# Allegro board AFK20.brd
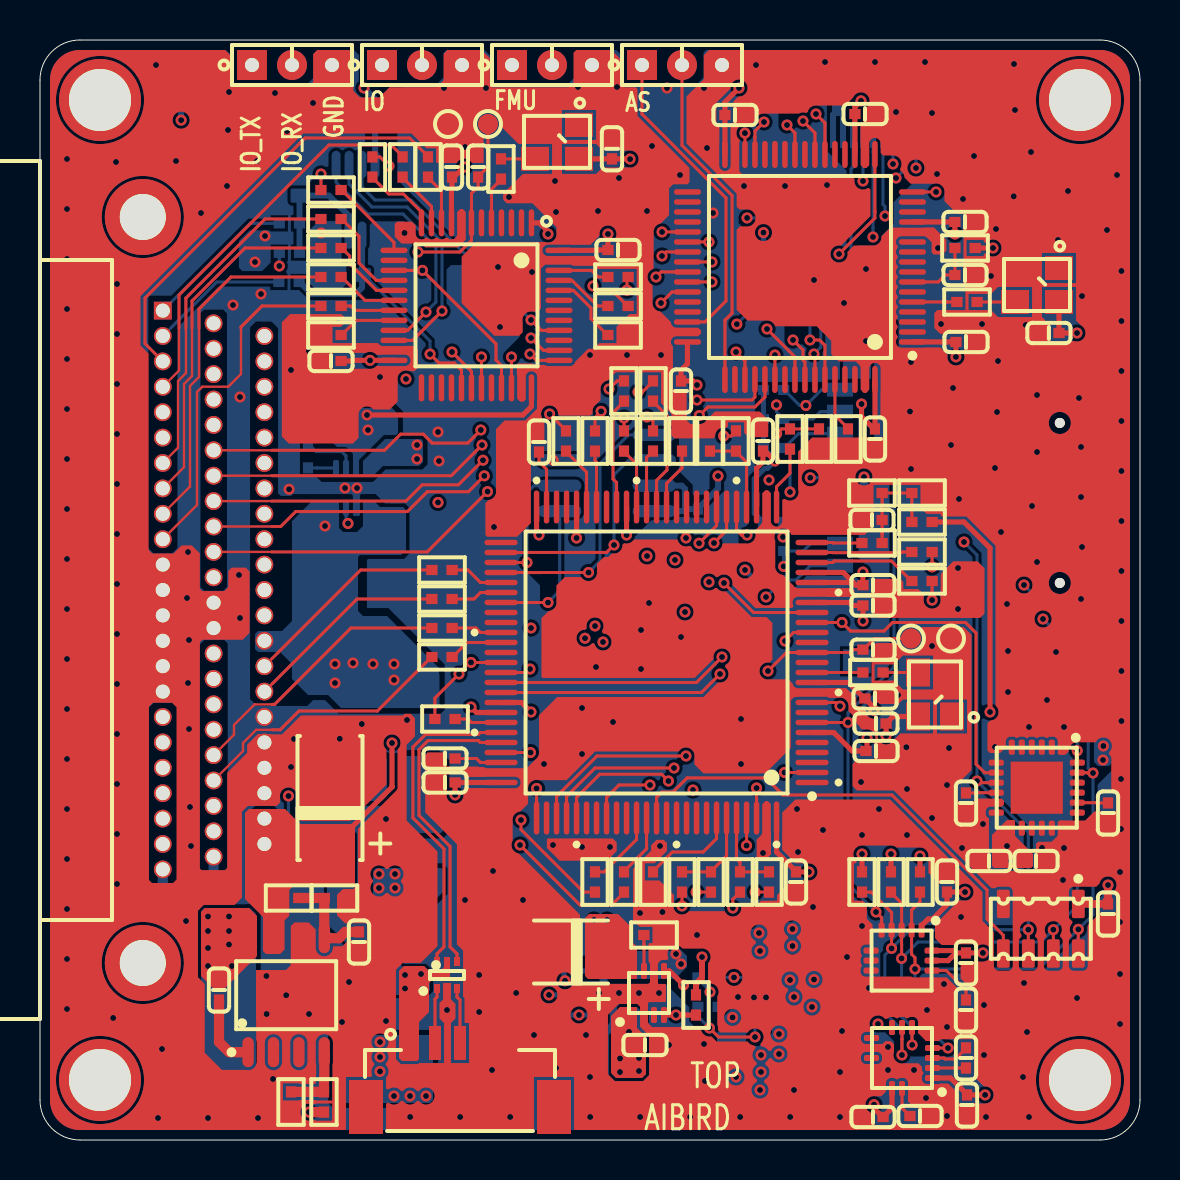
[diagram p0: board, top side]
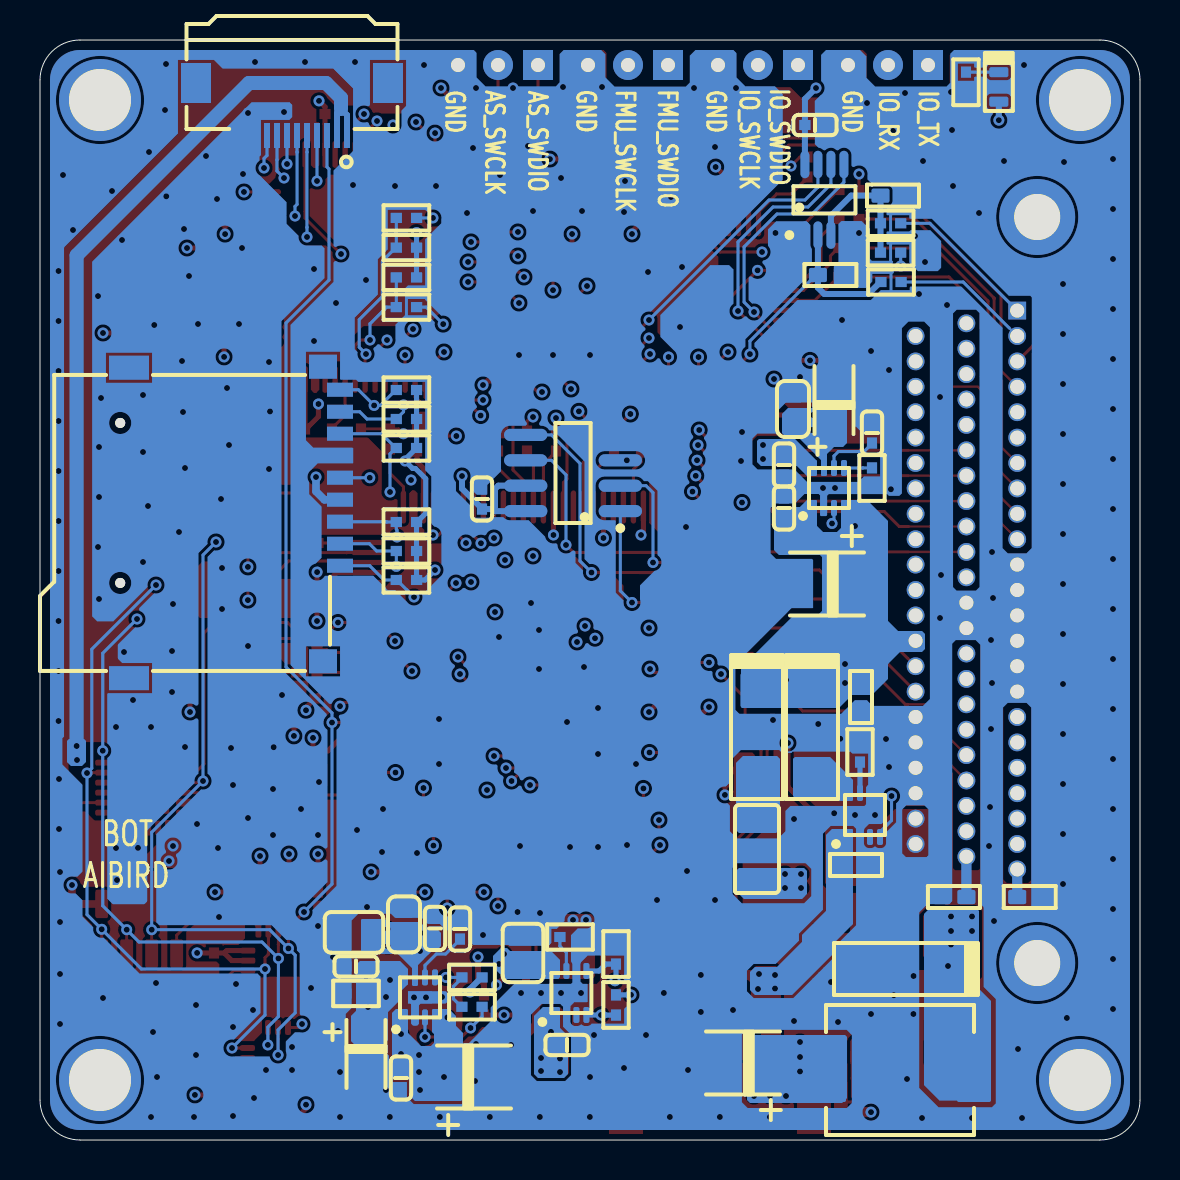
[diagram p1: board, bottom side, seen from below]

Outline 55 x 55 mm; copper layers: TOP, GND_L2, IN1_L3, IN2_L4, VCC_L5, BOTTOM. Coordinates in mm from the lower left corner of the outline.
Outline path: 0,53 0,2 arc(0.59,0.59) 2,0 53,0 arc(54.41,0.59) 55,2 55,53 arc(54.41,54.41) 53,55 2,55 arc(0.59,54.41) 0,53

## Design rules (mm)
net group DP1: nets FMU_OTG_FS_DM FMU_OTG_FS_DP

## Placement (name value [footprint] x y rotation side)
C1  0.1uF  [C0402]  41.25 51.3 0 top
C2  0.1uF  [C0402]  34.75 51.25 0 top
C3  0.1uF  [C0402]  28.6 49.56 90 top
C4  0.1uF  [C0402]  20.6 48.65 90 top
C5  0.1uF  [C0402]  21.91 48.65 90 top
C6  0.1uF  [C0402]  46.25 45.9 0 top
C7  0.1uF  [C0402]  28.9 44.5 0 top
C8  0.1uF  [C0402]  46.25 43.25 0 top
C9  0.1uF  [C0402]  50.45 40.35 180 top
C10  0.1uF  [C0402]  46.3 39.9 0 top
C11  0.1uF  [C0402]  14.55 38.95 180 top
C12  0.1uF  [C0402]  32.05 37.45 270 top
C13  0.1uF  [C0402]  41.75 35.05 270 top
C14  0.1uF  [C0402]  36.15 34.95 90 top
C15  2.2uF  [C0402]  24.95 34.9 90 top
C16  0.1u/50V  [C0402]  41.6 31 180 top
C17  0.1uF  [C0402]  41.65 27.74 0 top
C18  0.1uF  [C0402]  41.65 26.72 0 top
C19  0.1uF  [C0402]  41.65 24.52 0 top
C20  0.1uF  [C0402]  41.75 22.08 0 top
C21  0.1uF  [C0402]  41.8 20.83 180 top
C22  0.1uF  [C0402]  41.8 19.45 0 top
C23  2.2uF  [C0402]  20.25 19.08 180 top
C24  0.1uF  [C0402]  20.25 17.88 180 top
C25  10uF/35V  [C6032-C]  14.5 17.1 90 top
C26  2.2u/16V  [C0402]  46.3 16.85 270 top
C27  0.01u/50V  [C0402]  53.4 16.35 270 top
C28  2.2u/16V  [C0402]  47.45 13.95 180 top
C29  0.1uF/50V  [C0402]  49.8 13.95 0 top
C30  0.1uF  [C0402]  37.8 12.9 270 top
C31  10uF/16V  [C0402]  45.35 12.9 90 top
C32  0.1uF/50V  [C0402]  53.4 11.3 270 top
C33  NC  [C0402]  15.95 9.9 270 top
C34  47uF/10V  [C3528-B]  26.55 9.4 180 top
C35  0.1uF/50V  [C0402]  46.3 8.85 270 top
C36  0.01uF/50V  [C0402]  8.95 7.5 90 top
C37  10nF/50V  [C0402]  46.3 6.5 90 top
C38  1uF/16V  [C0402]  30.25 4.75 0 top
C39  0.1uF/50V  [C0402]  46.3 4.1 90 top
C40  0.1uF/50V  [C0402]  46.35 1.75 270 top
C41  10uF/16V  [C0402]  44 1.2 0 top
C42  10uF/16V  [C0402]  41.65 1.15 180 top
C43  0.1uF  [C0402]  16.25 50.75 180 bottom
C44  22uF/10V  [C3216-A]  15.3 37 90 bottom
C45  1uF  [C0603]  17.35 36.55 90 bottom
C46  10nF  [C0402]  13.4 35.35 90 bottom
C47  2.2uF  [C0402]  17.8 33.75 270 bottom
C48  0.1uF  [C0402]  32.9 32.05 90 bottom
C49  0.1uF  [C0402]  17.8 31.6 90 bottom
C50  47uF/10V  [C3528-B]  15.65 27.8 0 bottom
C51  1uF  [C0603]  36.8 10.78 90 bottom
C52  0.1uF  [C0402]  35.25 10.58 90 bottom
C53  10nF  [C0402]  34 10.55 90 bottom
C54  22uF/25V  [C0805]  39.3 10.38 0 bottom
C55  22uF/25V  [C0805]  30.85 9.35 90 bottom
C56  0.1uF  [C0402]  39.2 8.68 0 bottom
C57  1uF/16V  [C0402]  28.65 4.75 180 bottom
C58  22uF/10V  [C3216-A]  38.7 4.3 270 bottom
C59  47uF/10V  [C3528-B]  19.85 3.85 0 bottom
C60  47uF/25V  [C3528-B]  33.3 3.15 180 bottom
C61  0.1uF  [C0402]  36.95 3.1 270 bottom
D1  STM32F103C8T6  [LQFP48]  21.82 41.73 270 top
D2  STM32F427  [STM32F427VGT6_LQFP100]  30.83 23.88 180 top
D3  NUF2042XV6  [NUF2042XV6_SOT563-6]  20.35 8.25 0 top
D4  -  [PESD0402-140]  12.35 47.22 180 bottom
D5  -  [PESD0402-140]  15.48 43.25 180 bottom
D6  FM25V01  [FM25V01_SOIC8]  28.35 33.35 90 bottom
D7  -  [TF-01A]  40 37.51 270 bottom
D8  -  [PESD0402-140]  13.95 22.15 270 bottom
D9  SS24  [SMA]  19.15 20.35 270 bottom
D10  SS24  [SMA]  16.4 20.35 270 bottom
D11  -  [PESD0402-140]  14.2 13.75 180 bottom
D12  -  [PESD0402-140]  9.3 12.15 0 bottom
D13  -  [PESD0402-140]  5.51 12.15 180 bottom
D14  B340A  [SMA]  12 8.55 0 bottom
J1  CON3  [HDR200M_1X3]  10.6 53.75 0 top
J2  CON3  [HDR200M_1X3]  17.1 53.75 0 top
J3  CON3  [HDR200M_1X3]  23.6 53.75 0 top
J4  CON3  [HDR200M_1X3]  30.1 53.75 0 top
J5  4 HEADER  [SM05B-GHS-TB]  21 4.85 0 top
J6  HEADER 12  [0_5-12-12PBX]  42.4 50.23 0 bottom
L1  0630-4.7uH/5.5A  [L0630]  12 3.5 180 bottom
LED1  Red  [LED0603]  7.06 52.65 270 bottom
N1  74LVC2G240  [74LVC2G240_TSSOP8]  15.78 47.01 180 bottom
N2  MIC5332  [MIC5332_MLF8]  15.55 32.6 90 bottom
N3  BQ24313  [BQ24313_QFN8-DSG]  13.75 16.25 90 bottom
N4  MIC5332  [MIC5332_MLF8]  36 7.13 90 bottom
R1  220  [R0402]  16.62 48.65 270 top
R2  220  [R0402]  18.13 48.65 90 top
R3  220  [R0402]  19.4 48.65 90 top
R4  22R  [R0402]  23.05 48.55 270 top
R5  220  [R0402]  14.55 47.5 0 top
R6  220  [R0402]  14.55 46.05 180 top
R7  220  [R0402]  14.55 44.6 180 top
R8  10K  [R0402]  46.25 44.6 180 top
R9  220  [R0402]  14.55 43.15 180 top
R10  220  [R0402]  28.9 43.15 0 top
R11  22R  [R0402]  46.35 41.9 180 top
R12  220  [R0402]  14.55 41.7 180 top
R13  220  [R0402]  28.9 41.7 0 top
R14  10K  [R0402]  14.55 40.25 180 top
R15  10K  [R0402]  28.9 40.25 180 top
R16  220  [R0402]  29.2 37.45 90 top
R17  120  [R0402]  30.65 37.45 90 top
R18  10K/0.1%  [R0402]  37.5 35.05 90 top
R19  1M  [R0402]  38.95 35.05 90 top
R20  4.7K  [R0402]  40.4 35.05 90 top
R21  220  [R0402]  26.3 34.95 90 top
R22  220  [R0402]  27.75 34.95 90 top
R23  220  [R0402]  29.2 34.95 90 top
R24  120  [R0402]  30.65 34.95 90 top
R25  10K  [R0402]  32.1 34.95 270 top
R26  10K/0.1%  [R0402]  33.5 34.95 90 top
R27  10K/0.1%  [R0402]  34.8 34.95 90 top
R28  1.5K/0.1%  [R0402]  41.6 32.35 0 top
R29  1M  [R0402]  44.1 32.35 180 top
R30  13.7K/0.1%  [R0402]  44.1 30.9 0 top
R31  10K/0.1%  [R0402]  41.6 29.85 0 top
R32  120  [R0402]  44.1 29.4 0 top
R33  120  [R0402]  20.1 28.5 180 top
R34  120  [R0402]  44.1 27.95 0 top
R35  120  [R0402]  20.1 27.05 180 top
R36  220  [R0402]  20.1 25.6 180 top
R37  220  [R0402]  20.1 24.15 180 top
R38  22R  [R0402]  41.65 23.38 180 top
R39  470R  [R0402]  20.25 21.05 0 top
R40  120  [R0402]  27.75 12.9 270 top
R41  120  [R0402]  29.2 12.9 270 top
R42  10K  [R0402]  30.65 12.9 270 top
R43  1K5  [R0402]  32.1 12.9 270 top
R44  120  [R0402]  33.55 12.9 270 top
R45  1K5  [R0402]  35 12.9 270 top
R46  120  [R0402]  36.45 12.9 270 top
R47  NC  [R0402]  41.1 12.9 270 top
R48  NC  [R0402]  42.55 12.9 270 top
R49  NC  [R0402]  44 12.9 270 top
R50  NC  [R0402]  12.43 12.1 180 top
R51  NC  [R0402]  14.72 12.1 180 top
R52  16.5K  [R0402]  30.7 10.25 180 top
R53  1M  [R0402]  32.8 6.75 90 top
R54  10K  [R0402]  12.55 1.9 90 top
R55  10K  [R0402]  14.2 1.9 270 top
R56  10K  [R0402]  8.7 52.89 90 bottom
R57  220  [R0402]  12.47 45.84 180 bottom
R58  10K  [R0402]  12.47 44.37 0 bottom
R59  220  [R0402]  12.45 42.9 180 bottom
R60  100K  [R0402]  36.68 37.5 180 bottom
R61  100K  [R0402]  36.68 36.05 180 bottom
R62  100K  [R0402]  36.68 34.6 180 bottom
R63  10K  [R0402]  13.4 33.1 90 bottom
R64  100K  [R0402]  36.68 30.9 180 bottom
R65  100K  [R0402]  36.68 29.45 180 bottom
R66  100K  [R0402]  36.68 28 180 bottom
R67  100K  [R0402]  14 19.4 270 bottom
R68  25.5K  [R0402]  28.5 10.15 0 bottom
R69  10K  [R0402]  26.2 9.3 270 bottom
R70  10K  [R0402]  33.4 8.13 0 bottom
R71  220R  [R0402]  39.2 7.33 0 bottom
R72  1M  [R0402]  26.2 6.75 90 bottom
R73  10K  [R0402]  33.4 6.66 0 bottom
R74  120  [R0402]  36.68 46.1 180 bottom
R75  1K5  [R0402]  36.68 44.62 180 bottom
R76  1K5  [R0402]  36.68 43.13 180 bottom
R77  120  [R0402]  36.68 41.64 180 bottom
RT1  PTS120616V035  [F1206]  19.15 14.55 90 bottom
TP1  MH  [MTG310_410]  3 52 0 top
TP2  MH  [MTG310_410]  52 52 0 top
TP3  T  [TEST1_0]  20.4 50.8 270 top
TP4  T  [TEST1_0]  22.4 50.8 270 top
TP5  T  [TEST1_0]  43.55 25.08 180 top
TP6  T  [TEST1_0]  45.55 25.08 180 top
TP7  MH  [MTG310_410]  3 3 0 top
TP8  MH  [MTG310_410]  52 3 0 top
U1  stm32f103rct6  [LQFP64]  38 43.65 180 top
U2  J30J-66  [J30J-66ZKW-J]  6.14 41.47 270 top
U3  MPU6000  [QFN24_MPU60X0]  49.84 17.62 270 top
U4  MS5611-01BA03  [SOP125P8]  50.04 10.56 270 top
U5  L3GD20H  [L3GD20H_LGA16]  43.08 8.97 270 top
U6  BQ24315  [BQ24315_QFN8-DSG]  30.45 7.35 90 top
U7  TPS5430DDA  [TPS5430_DDA]  12.31 7.24 0 top
U8  LSM303D  [LSM303D_LGA16]  43.1 4.1 180 top
U9  BQ24315  [BQ24315_QFN8-DSG]  28.43 7.35 90 bottom
X1  24M  [OSC3225]  25.85 49.91 180 top
X2  24M  [OSC3225]  49.85 42.75 180 top
X3  24M  [OSC3225]  44.75 22.28 90 top

## Library data of the parts
C1-C15 C17-C24 C30 C38 C43 C45-C49 C51-C57 C61 = C_2: User Part Number: pn; Tolerance: RichardLC
C16 C26-C29 C31-C33 C35-C37 C39-C42 = CAP NP: User Part Number: pn; Tolerance: RichardLC
C25 C34 C44 C50 C58-C60 = CAP POL: User Part Number: pn; Tolerance: RichardLC
D1 = STM32F103C8T6_1: User Part Number: pn; Tolerance: RichardLC
D2 = STM32F427_10: User Part Number: pn; Tolerance: RichardLC
D3 = NUF2042XV6: User Part Number: pn; Tolerance: RichardLC
D4 D5 D13 = DIODE ZENER1
D6 = FM25V01: User Part Number: pn; Tolerance: RichardLC
D7 = 2908-05WB-MG_0
D8 D11 D12 = DIODE ZENER1_1
D9 D10 = DIODE: User Part Number: pn; Tolerance: RichardLC
D14 = DIODE_SCHOTTKY_0: User Part Number: pn; Tolerance: RichardLC
J1-J4 = CON3: User Part Number: pn; Tolerance: RichardLC
J5 = 4 HEADER_1
J6 = HEADER 12
L1 = Inductor: User Part Number: pn; Tolerance: RichardLC
LED1 = LED: User Part Number: pn; Tolerance: RichardLC
N1 = 74LVC2G240: User Part Number: pn; Tolerance: RichardLC
N2 N4 = MIC5332: User Part Number: pn; Tolerance: RichardLC
N3 = BQ24313_1: User Part Number: pn; Tolerance: RichardLC
R1-R3 R5-R7 R9 R10 R12-R19 R21-R24 R26 R27 R29 R31-R37 R40 R41 R43-R46 R52 R53 R56-R77 = R: User Part Number: pn; Tolerance: RichardLC
R4 R8 R11 R20 R25 R28 R30 R38 R39 R42 R47-R51 R54 R55 = R2: User Part Number: pn; Tolerance: RichardLC
RT1 = VARISTOR SYM
TP1 TP2 TP7 TP8 = TP: User Part Number: pn; Tolerance: RichardLC
TP3-TP6 = TEST POINT
U1 = stm32f103rct6_2: User Part Number: pn; Tolerance: RichardLC
U2 = J30J-66
U3 = MPU6000: User Part Number: pn; Tolerance: RichardLC
U4 = MS5607B: User Part Number: pn; Tolerance: RichardLC
U5 = L3GD20H_0: User Part Number: pn; Tolerance: RichardLC
U6 U9 = BQ24315_2: User Part Number: pn; Tolerance: RichardLC
U7 = TPS5430: User Part Number: pn; Tolerance: RichardLC
U8 = LSM303D: User Part Number: pn; Tolerance: RichardLC
X1-X3 = SMD Crystal Oscillators_0

## Footprints (pads in the part's own frame, mm; a bottom-side part is the same pattern mirrored in y, then rotated)
0_5-12-12PBX
  rect 1.5x2 smd: (-4.8,-2.625) (4.8,-2.625)
  rect 0.3x1.25 smd: 1(-2.75,0) 2(-2.25,0) 3(-1.75,0) 4(-1.25,0) 5(-0.75,0) 6(-0.25,0) 7(0.25,0) 8(0.75,0) 9(1.25,0) 10(1.75,0) 11(2.25,0) 12(2.75,0)
74LVC2G240_TSSOP8
  oval 0.45x1.37 smd: 1(-0.975,-1.765) 2(-0.325,-1.765) 3(0.325,-1.765) 4(0.975,-1.765) 5(0.975,1.765) 6(0.325,1.765) 7(-0.325,1.765) 8(-0.975,1.765)
BQ24313_QFN8-DSG
  custom 0.8x0.3 smd: 1(-1.1,0.75) 2(-1.1,0.25) 3(-1.1,-0.25) 4(-1.1,-0.75) 5(1.1,-0.75) 6(1.1,-0.25) 7(1.1,0.25) 8(1.1,0.75)
  rect 0.9x1.6 smd: 9(0,0)
BQ24315_QFN8-DSG
  custom 0.8x0.3 smd: 1(-1.1,0.75) 2(-1.1,0.25) 3(-1.1,-0.25) 4(-1.1,-0.75) 5(1.1,-0.75) 6(1.1,-0.25) 7(1.1,0.25) 8(1.1,0.75)
  rect 0.9x1.6 smd: 9(0,0)
C0402
  rect 0.559x0.508 smd: 1(-0.504,0) 2(0.504,0)
C0603
  rect 0.762x0.813 smd: 1(-0.706,0) 2(0.706,0)
C0805
  rect 0.9x1.27 smd: 1(-0.825,0) 2(0.825,0)
C3216-A
  rect 1.4x1.2 smd: 1(-1.25,0) 2(1.25,0)
C3528-B
  rect 1.6x2.4 smd: 1(-1.5,0) 2(1.5,0)
C6032-C
  custom 2.25x2.4 smd: 1(-2.475,0) 2(2.475,0)
F1206
  rect 1x1.9 smd: 1(-1.5,0) 2(1.5,0)
FM25V01_SOIC8
  oval 0.61x2.17 smd: 1(-1.905,-2.365) 2(-0.635,-2.365) 3(0.635,-2.365) 4(1.905,-2.365) 5(1.905,2.365) 6(0.635,2.365) 7(-0.635,2.365) 8(-1.905,2.365)
HDR200M_1X3
  rect 1.5x1.5 hole 0.7: 1(0,0)
  round 1.5 hole 0.7: 2(2,0) 3(4,0)
J30J-66ZKW-J
  round 3.8 hole 2.3: (-4.68,-1) (32.62,-1)
  rect 0.89x0.89 hole 0.7: 1(0,0)
  round 0.89 hole 0.7: 2(1.27,0) 3(2.54,0) 4(3.81,0) 5(5.08,0) 6(6.35,0) 7(7.62,0) 8(8.89,0) 9(10.16,0) 10(11.43,0) 11(12.7,0) 12(13.97,0) 13(15.24,0) 14(16.51,0) 15(17.78,0) 16(19.05,0) 17(20.32,0) 18(21.59,0) 19(22.86,0) 20(24.13,0) 21(25.4,0) 22(26.67,0) 23(27.94,0) 24(0.635,2.54) 25(1.905,2.54) 26(3.175,2.54) 27(4.445,2.54) 28(5.715,2.54) 29(6.985,2.54) 30(8.255,2.54) 31(9.525,2.54) 32(10.795,2.54) 33(12.065,2.54) 34(13.335,2.54) 35(14.605,2.54) 36(15.875,2.54) 37(17.145,2.54) 38(18.415,2.54) 39(19.685,2.54) 40(20.955,2.54) 41(22.225,2.54) 42(23.495,2.54) 43(24.765,2.54) 44(26.035,2.54) 45(27.305,2.54) 46(1.27,5.08) 47(2.54,5.08) 48(3.81,5.08) 49(5.08,5.08) 50(6.35,5.08) 51(7.62,5.08) 52(8.89,5.08) 53(10.16,5.08) 54(11.43,5.08) 55(12.7,5.08) 56(13.97,5.08) 57(15.24,5.08) 58(16.51,5.08) 59(17.78,5.08) 60(19.05,5.08) 61(20.32,5.08) 62(21.59,5.08) 63(22.86,5.08) 64(24.13,5.08) 65(25.4,5.08) 66(26.67,5.08)
L3GD20H_LGA16
  custom 0.75x0.3 smd: 1(-1.525,1) 2(-1.525,0.5) 3(-1.525,0) 4(-1.525,-0.5) 5(-1.525,-1) 9(1.525,-1) 10(1.525,-0.5) 11(1.525,0) 12(1.525,0.5) 13(1.525,1)
  custom 0.3x0.75 smd: 6(-0.5,-1.525) 7(0,-1.525) 8(0.5,-1.525) 14(0.5,1.525) 15(0,1.525) 16(-0.5,1.525)
L0630
  custom 1.7x3.2 smd: 1(-3.55,0) 2(3.7,0)
LED0603
  custom 0.5x0.95 smd: 1(-0.738,0) 2(0.738,0)
LQFP48
  oval 1.35x0.27 smd: 1(-4.125,2.75) 2(-4.125,2.25) 3(-4.125,1.75) 4(-4.125,1.25) 5(-4.125,0.75) 6(-4.125,0.25) 7(-4.125,-0.25) 8(-4.125,-0.75) 9(-4.125,-1.25) 10(-4.125,-1.75) 11(-4.125,-2.25) 12(-4.125,-2.75) 25(4.125,-2.75) 26(4.125,-2.25) 27(4.125,-1.75) 28(4.125,-1.25) 29(4.125,-0.75) 30(4.125,-0.25) 31(4.125,0.25) 32(4.125,0.75) 33(4.125,1.25) 34(4.125,1.75) 35(4.125,2.25) 36(4.125,2.75)
  oval 0.27x1.35 smd: 13(-2.75,-4.125) 14(-2.25,-4.125) 15(-1.75,-4.125) 16(-1.25,-4.125) 17(-0.75,-4.125) 18(-0.25,-4.125) 19(0.25,-4.125) 20(0.75,-4.125) 21(1.25,-4.125) 22(1.75,-4.125) 23(2.25,-4.125) 24(2.75,-4.125) 37(2.75,4.125) 38(2.25,4.125) 39(1.75,4.125) 40(1.25,4.125) 41(0.75,4.125) 42(0.25,4.125) 43(-0.25,4.125) 44(-0.75,4.125) 45(-1.25,4.125) 46(-1.75,4.125) 47(-2.25,4.125) 48(-2.75,4.125)
LQFP64
  oval 1.35x0.27 smd: 1(-5.625,3.75) 2(-5.625,3.25) 3(-5.625,2.75) 4(-5.625,2.25) 5(-5.625,1.75) 6(-5.625,1.25) 7(-5.625,0.75) 8(-5.625,0.25) 9(-5.625,-0.25) 10(-5.625,-0.75) 11(-5.625,-1.25) 12(-5.625,-1.75) 13(-5.625,-2.25) 14(-5.625,-2.75) 15(-5.625,-3.25) 16(-5.625,-3.75) 33(5.625,-3.75) 34(5.625,-3.25) 35(5.625,-2.75) 36(5.625,-2.25) 37(5.625,-1.75) 38(5.625,-1.25) 39(5.625,-0.75) 40(5.625,-0.25) 41(5.625,0.25) 42(5.625,0.75) 43(5.625,1.25) 44(5.625,1.75) 45(5.625,2.25) 46(5.625,2.75) 47(5.625,3.25) 48(5.625,3.75)
  oval 0.27x1.35 smd: 17(-3.75,-5.625) 18(-3.25,-5.625) 19(-2.75,-5.625) 20(-2.25,-5.625) 21(-1.75,-5.625) 22(-1.25,-5.625) 23(-0.75,-5.625) 24(-0.25,-5.625) 25(0.25,-5.625) 26(0.75,-5.625) 27(1.25,-5.625) 28(1.75,-5.625) 29(2.25,-5.625) 30(2.75,-5.625) 31(3.25,-5.625) 32(3.75,-5.625) 49(3.75,5.625) 50(3.25,5.625) 51(2.75,5.625) 52(2.25,5.625) 53(1.75,5.625) 54(1.25,5.625) 55(0.75,5.625) 56(0.25,5.625) 57(-0.25,5.625) 58(-0.75,5.625) 59(-1.25,5.625) 60(-1.75,5.625) 61(-2.25,5.625) 62(-2.75,5.625) 63(-3.25,5.625) 64(-3.75,5.625)
LSM303D_LGA16
  custom 0.75x0.3 smd: 1(-1.525,1) 2(-1.525,0.5) 3(-1.525,0) 4(-1.525,-0.5) 5(-1.525,-1) 9(1.525,-1) 10(1.525,-0.5) 11(1.525,0) 12(1.525,0.5) 13(1.525,1)
  custom 0.3x0.75 smd: 6(-0.5,-1.525) 7(0,-1.525) 8(0.5,-1.525) 14(0.5,1.525) 15(0,1.525) 16(-0.5,1.525)
MIC5332_MLF8
  custom 0.8x0.3 smd: 1(-1,0.75) 2(-1,0.25) 3(-1,-0.25) 4(-1,-0.75) 5(1,-0.75) 6(1,-0.25) 7(1,0.25) 8(1,0.75)
  rect 0.6x1.2 smd: 9(0,0)
MTG310_410
  round 4.1 hole 3.1: 1(0,0)
NUF2042XV6_SOT563-6
  rect 0.3x0.45 smd: 1(-0.5,-0.675) 2(0,-0.675) 3(0.5,-0.675) 4(0.5,0.675) 5(0,0.675) 6(-0.5,0.675)
OSC3225
  rect 1.4x1.2 smd: 1(-1.1,-0.85) 2(1.1,-0.85) 3(1.1,0.85) 4(-1.1,0.85)
PESD0402-140
  custom 0.9x0.71 smd: 1(-0.625,0) 2(0.625,0)
QFN24_MPU60X0
  custom 0.75x0.3 smd: 1(-2.025,1.25) 2(-2.025,0.75) 3(-2.025,0.25) 4(-2.025,-0.25) 5(-2.025,-0.75) 6(-2.025,-1.25) 13(2.025,-1.25) 14(2.025,-0.75) 15(2.025,-0.25) 16(2.025,0.25) 17(2.025,0.75) 18(2.025,1.25)
  custom 0.3x0.75 smd: 7(-1.25,-2.025) 8(-0.75,-2.025) 9(-0.25,-2.025) 10(0.25,-2.025) 11(0.75,-2.025) 12(1.25,-2.025) 19(1.25,2.025) 20(0.75,2.025) 21(0.25,2.025) 22(-0.25,2.025) 23(-0.75,2.025) 24(-1.25,2.025)
  rect 2.6x2.6 smd: 25(0,0)
R0402
  rect 0.559x0.508 smd: 1(-0.505,0) 2(0.505,0)
SM05B-GHS-TB
  rect 1.7x2.7 smd: (-4.7,-3.2) (4.7,-3.2)
  rect 0.6x1.7 smd: 1(-2.5,0) 2(-1.25,0) 3(0,0) 4(1.25,0) 5(2.5,0)
SMA
  custom 1.72x1.65 smd: 1(-2.135,0) 2(2.135,0)
SOP125P8
  custom 1.42x0.64 smd: 1(-1.24,1.875) 2(-1.24,0.625) 3(-1.24,-0.625) 4(-1.24,-1.875) 5(1.24,-1.875) 6(1.24,-0.625) 7(1.24,0.625) 8(1.24,1.875)
STM32F427VGT6_LQFP100
  oval 1.65x0.27 smd: 1(-7.775,6) 2(-7.775,5.5) 3(-7.775,5) 4(-7.775,4.5) 5(-7.775,4) 6(-7.775,3.5) 7(-7.775,3) 8(-7.775,2.5) 9(-7.775,2) 10(-7.775,1.5) 11(-7.775,1) 12(-7.775,0.5) 13(-7.775,0) 14(-7.775,-0.5) 15(-7.775,-1) 16(-7.775,-1.5) 17(-7.775,-2) 18(-7.775,-2.5) 19(-7.775,-3) 20(-7.775,-3.5) 21(-7.775,-4) 22(-7.775,-4.5) 23(-7.775,-5) 24(-7.775,-5.5) 25(-7.775,-6) 51(7.775,-6) 52(7.775,-5.5) 53(7.775,-5) 54(7.775,-4.5) 55(7.775,-4) 56(7.775,-3.5) 57(7.775,-3) 58(7.775,-2.5) 59(7.775,-2) 60(7.775,-1.5) 61(7.775,-1) 62(7.775,-0.5) 63(7.775,0) 64(7.775,0.5) 65(7.775,1) 66(7.775,1.5) 67(7.775,2) 68(7.775,2.5) 69(7.775,3) 70(7.775,3.5) 71(7.775,4) 72(7.775,4.5) 73(7.775,5) 74(7.775,5.5) 75(7.775,6)
  oval 0.27x1.65 smd: 26(-6,-7.775) 27(-5.5,-7.775) 28(-5,-7.775) 29(-4.5,-7.775) 30(-4,-7.775) 31(-3.5,-7.775) 32(-3,-7.775) 33(-2.5,-7.775) 34(-2,-7.775) 35(-1.5,-7.775) 36(-1,-7.775) 37(-0.5,-7.775) 38(0,-7.775) 39(0.5,-7.775) 40(1,-7.775) 41(1.5,-7.775) 42(2,-7.775) 43(2.5,-7.775) 44(3,-7.775) 45(3.5,-7.775) 46(4,-7.775) 47(4.5,-7.775) 48(5,-7.775) 49(5.5,-7.775) 50(6,-7.775) 76(6,7.775) 77(5.5,7.775) 78(5,7.775) 79(4.5,7.775) 80(4,7.775) 81(3.5,7.775) 82(3,7.775) 83(2.5,7.775) 84(2,7.775) 85(1.5,7.775) 86(1,7.775) 87(0.5,7.775) 88(0,7.775) 89(-0.5,7.775) 90(-1,7.775) 91(-1.5,7.775) 92(-2,7.775) 93(-2.5,7.775) 94(-3,7.775) 95(-3.5,7.775) 96(-4,7.775) 97(-4.5,7.775) 98(-5,7.775) 99(-5.5,7.775) 100(-6,7.775)
TEST1_0
  round 1 smd: 1(0,0)
TF-01A
  rect 1.2x1.4 smd: (-1.15,-0.85) (13.58,-0.85)
  rect 1.2x2 smd: (-1.1,-10.55) (14.42,-10.55)
  round 0.5 hole 0.8 unplated: (1.66,-10.99) (9.66,-10.99)
  rect 0.7x1.3 smd: 1(8.8,0) 2(7.7,0) 3(6.6,0) 4(5.5,0) 5(4.4,0) 6(3.3,0) 7(2.2,0) 8(1.1,0) 9(0,0)
TPS5430_DDA
  oval 0.56x1.5 smd: 1(-1.905,-2.85) 2(-0.635,-2.85) 3(0.635,-2.85) 4(1.905,-2.85) 5(1.905,2.85) 6(0.635,2.85) 7(-0.635,2.85) 8(-1.905,2.85)
  rect 3x2.5 smd: 9(0,0)

## Nets
GND: C1.2 C2.2 C3.2 C4.2 C5.2 C6.2 C7.2 C8.2 C9.2 C10.2 C11.2 C12.2 C13.2 C14.2 C15.2 C16.2 C17.2 C18.2 C19.2 C20.2 C21.2 C22.2 C23.2 C24.2 C25.2 C26.2 C27.2 C28.2 C29.2 C30.2 C31.2 C32.2 C33.2 C34.2 C35.2 C37.1 C38.2 C40.2 C41.2 C42.2 C43.2 C44.2 C45.2 C46.2 C47.2 C48.2 C49.2 C50.2 C51.2 C52.2 C53.2 C54.2 C55.2 C56.2 C57.2 C58.2 C59.2 C60.2 C61.2 D1.8(VSSA) D1.23(VSS_1) D1.35(VSS_2) D1.47(VSS_3) D2.10(VSS1) D2.20(VSSA) D2.27(VSS2) D2.74(VSS3) D2.99(VSS4) D3.2(GND) D4.2(ANODE) D5.2(ANODE) D6.4(VSS) D7.6(GND) D8.2(ANODE) D11.2(ANODE) D12.2(ANODE) D13.2(ANODE) D14.2(A) J1.3 J2.3 J3.3 J4.3 J5.4 J5.5 J6.10 J6.11 J6.12 N1.1(1\O\E\) N1.4(GND) N2.2(GND_IO) N2.9(GND) N3.2(VSS) N3.5(C\E\) N3.6(VBAT) N3.9(PGND) N4.2(GND_IO) N4.9(GND) R14.2 R15.1 R19.1 R20.1 R25.1 R26.2 R28.1 R29.1 R42.2 R51.1 R52.1 R54.1 R56.1 R63.1 R67.1 R68.1 R69.1 R71.2 TP3.1 TP6.1 U1.12(VSSA) U1.18(VSS_4) U1.31(VSS_1) U1.47(VSS_2) U1.63(VSS_3) U2.11 U2.12 U2.13 U2.14 U2.15 U2.16 U2.35 U2.36 U2.61 U2.62 U2.63 U2.64 U3.1(CLKIN) U3.11(FSYNC) U3.18(GND) U4.2(PS) U4.3(GND) U5.9(GND0) U5.10(GND1) U5.11(GND2) U5.12(GND3) U5.13(GND4) U6.2(VSS) U6.6(VBAT) U6.9(PGND) U7.6(GND) U7.9(PWPD) U8.5(GND0) U8.10(RSRV) U8.12(GND1) U8.13(GND2) U8.16(GND3) U9.2(VSS) U9.6(VBAT) U9.9(PGND) X1.2(GND) X2.2(GND) X3.2(GND)
VBUS: D2.68(PA9/TIM1_CH2/I2C3_SMBA/USART1_T) D3.5(VBUS) D11.1(CATHODE) J5.1 N3.1(IN)
VDD_3V3_SENSORS: C28.1 C29.1 C31.1 C32.1 C35.1 C40.1 C42.1 C56.1 C58.1 J6.1 J6.2 N4.8(VOUT1) R47.1 R48.1 R49.1 R71.1 U3.13(VDD) U4.1(VDD) U5.1(VDD_IO) U5.15(VDD0) U5.16(VDD1) U8.1(VDD_IO) U8.14(VDD)
VDD_3V3_SENSORS_EN: D2.2(PE3-TRACED0/SAI1_SD_B/FMC_A1) N4.5(EN1) R70.2 R73.2
VDD_5V_HIPOWER: C34.1 D12.1(CATHODE) U2.45 U6.8(OUT)
VDD_5V_HIPOWER_OC: D2.41(PE10-TIM1_CH2N/FMC_D7) R53.1 U6.4(F\A\U\L\T\)
VDD_5V_IN: C59.1 L1.1 R27.2 R55.2 RT1.1
VDD_5V_PERIPH: C55.1 D13.1(CATHODE) U2.23 U9.8(OUT)
VDD_5V_PERIPH_EN: D2.67(PA8/MCO1/TIM1_CH1/I2C3_SCL/USAR) R69.2 U6.5(C\E\) U9.5(C\E\)
VDD_5V_PERIPH_OC: D2.46(PE15-TIM1_BKIN/FMC_D12/LCD_R7) R72.1 U9.4(F\A\U\L\T\)
VDD_5V_SENS: D2.29(PA4/SPI1_NSS/SPI3_NSS/I2S3_WS/U) R26.1 R27.1
VIN_3S-6S: C25.1 R30.2 R50.2 U2.65 U2.66 U7.7(VIN)
ACTION_IO: U1.25(PC5/ADC12_IN15) U2.26
AS-I2C1-SCL-J30J: R74.2 U2.29
AS-I2C1-SDA-J30J: R77.2 U2.30
AS-RADAR_R5: U1.54(PD2/UART5_RX) U2.53
AS-RADAR_T5: U1.53(PC12/UART5_TX/SDIO_CK) U2.54
AS-SWCLK: J4.2 U1.49(PA14/JTCK-SWCLK)
AS-SWDIO: J4.1 U1.46(PA13/JTMS-SWDIO)
AS-USART1_RX: U1.43(PA10/USART1_RX/TIM1_CH3) U2.52
AS-USART1_TX: U1.42(PA9/USART1_TX/TIM1_CH2) U2.51
AS-USART3_RX: U1.30(PB11/I2C2_SDA/USART3_RX/TIM2_CH) U2.24
AS-USART3_TX: U1.29(PB10/I2C2_SCL/USART3_TX//TIM2_C) U2.25
AS-USART4_RX: U1.52(PC11/UART4_RX/SDIO_D3//USART3_R) U2.55
AS-USART4_TX: U1.51(PC10/UART4_TX/SDIO_D2//USART3_T) U2.56
AS-VDD_3V3: C1.1 C2.1 C6.1 C9.1 C10.1 C12.1 C13.1 C47.1 N2.8(VOUT1) R8.1 R75.2 R76.2 U1.1(VBAT) U1.13(VDDA) U1.19(VDD_4#19) U1.32(VDD_1) U1.48(VDD_2) U1.64(VDD_4#64) X2.4(VDD)
AS_OSC_IN: R11.2 U1.5(OSC_IN/PD0)
AS_PWM0: U1.41(PA8/USART1_CK/TIM1_CH1/MCO) U2.50
AS_PWM1: U1.40(PC9/TIM8_CH4/SDIO_D1//TIM3_CH4) U2.49
AS_PWM2: U1.39(PC8/TIM8_CH3/SDIO_D0//TIM3_CH3) U2.48
AS_PWM3: U1.38(PC7/I2S3_MCK/TIM8_CH2/SDIO_D7//) U2.47
BATT_CURRENT_SENS-J30J: R18.2 R19.2 U2.57
CAMERA_IO: U1.37(PC6/I2S2_MCK/TIM8_CH1/SDIO_D6//) U2.46
CAPTURE_SPEED0: U1.22(PA6/SPI1_MISO/TIM8_BKIN/ADC12_I) U2.28
CAPTURE_SPEED1: U1.23(PA7/SPI1_MOSI/TIM8_CH1N/ADC12_I) U2.27
FMU2AS-RX8: D2.97(PE0-TIM4_ETR/UART8_RX/FMC_NBL0/) U1.16(PA2/USART2_TX/TIM5_CH3/ADC123_I)
FMU2AS-TX8: D2.98(PE1--UART8_TX/FMC_NBL1/DCMI_D3) U1.17(PA3/USART2_RX/ADC123_IN3/TIM2_C)
FMU-CH1: D2.45(PE14-TIM1_CH4/SPI4_MOSI/FMC_D11) R21.1
FMU-CH1_OUT-J30J: R21.2 U2.37
FMU-CH2: D2.44(PE13-TIM1_CH3/SPI4_MISO/FMC_D10) R22.1
FMU-CH2_OUT-J30J: R22.2 U2.38
FMU-CH3: D2.42(PE11-TIM1_CH2/SPI4_NSS/FMC_D8/L) R16.1
FMU-CH3_OUT-J30J: R16.2 U2.39
FMU-CH4: D2.40(PE9-TIM1_CH1/FMC_D6) R23.1
FMU-CH4_OUT-J30J: R23.2 U2.40
FMU-CH5: D2.60(PD13-TIM4_CH2/FMC_A18) R36.1
FMU-CH5_OUT-J30J: R36.2 U2.41
FMU-CH6: D2.61(PD14-TIM4_CH3/FMC_D0) R37.1
FMU-CH6_OUT-J30J: R37.2 U2.42
FMU-I2C1-SCL-J30J: R44.2 U2.44
FMU-I2C1-SDA-J30J: R46.2 U2.43
FMU-I2C1_SCL: D2.95(PB8-TIM4_CH3/TIM10_CH1/I2C1_SCL) R43.1 R44.1
FMU-I2C1_SDA: D2.96(PB9-TIM4_CH4/TIM11_CH1/I2C1_SDA) R45.1 R46.1
FMU-RESET: C19.1 D2.14(NRST0) N4.3(POR2) R73.1 TP5.1
FMU-RX2: D2.87(PD6-SPI3_MOSI/I2S3_SD/SAI1_SD_A) R41.1
FMU-RX2-J30J: R41.2 U2.22
FMU-RX3: D2.56(PD9-USART3_RX/FMC_D14) R35.1
FMU-RX3-J30J: R35.2 U2.60
FMU-RX4: D2.24(PA1/TIM2_CH2/TIM5_CH2/USART2_RT) R32.1
FMU-RX4-J30J: R32.2 U2.19
FMU-RX7: D2.38(PE7-TIM1_ETR/UART7_RX/FMC_D4) R17.1
FMU-RX7-J30J: R17.2 U2.33
FMU-SWCLK: D2.76(PA14/JTCK-SWCLK) J3.2
FMU-SWDIO: D2.72(PA13/JTMS-SWDIO) J3.1
FMU-TX2: D2.86(PD5-USART2_TX/FMC_NWE) R40.1
FMU-TX2-J30J: R40.2 U2.21
FMU-TX3: D2.55(PD8-USART3_TX/FMC_D13) R33.1
FMU-TX3-J30J: R33.2 U2.59
FMU-TX4: D2.23(PA0/WKUP/TIM2_CH1/TIM2_ETR/TIM5) R34.1
FMU-TX4-J30J: R34.2 U2.20
FMU-TX7: D2.39(PE8-TIM1_CH1N/UART7_TX/FMC_D5/) R24.1
FMU-TX7-J30J: R24.2 U2.34
FMU-VDD_3V3: C14.1 C17.1 C18.1 C20.1 C21.1 C22.1 C24.1 C30.1 C48.1 C51.1 C52.1 C54.1 D2.6(VBAT) D2.11(VDD1) D2.19(VDD2) D2.21(VREF+) D2.22(VDDA) D2.28(VDD3) D2.50(VDD4) D2.75(VDD5) D2.100(VDD6) D6.3(W\) D6.7(H\O\L\D\) D6.8(VDD) D7.4(VCC) N4.7(VOUT2) R43.2 R45.2 R53.2 R60.2 R61.2 R62.2 R64.2 R65.2 R66.2 R72.2 X3.4(VDD)
FMU_ACCEL_MAG_CS_N: D2.9(PC15-OSC32_OUT) J6.6 U8.8(CS)
FMU_BARO_CS_N: D2.88(PD7-USART2_CK/FMC_NE1/FMC_NCE2) U4.5(CSB5)
FMU_BATT_CURRENT_SENS: D2.26(PA3/TIM2_CH4/TIM5_CH4/TIM9_CH2/) R18.1
FMU_BATT_VOLTAGE_SENS: D2.25(PA2/TIM2_CH3/TIM5_CH3/TIM9_CH1/) R31.1
FMU_BOOT0: D2.94(BOOT0) R42.1
FMU_GYRO_CS_N: D2.7(PC13) J6.3 U5.5(CS)
FMU_MPU_CS_N: D2.17(PC2-SPI2_MISO/I2S2EXT_SD/OTG_HS) J6.5 U3.8(/CS)
FMU_OTG_FS_DM: D2.70(PA11/TIM1_CH4/USART1_CTS/CAN1_R) D3.6(D1O)
FMU_OTG_FS_DP: D2.71(PA12/TIM1_ETR/USART1_RTS/CAN1_T) D3.4(D2O)
FMU_SDIO_CK: D2.80(PC12-SPI3_MOSI/I2S3_SD/USART3_C) D7.5(CLK)
FMU_SDIO_CMD: D2.83(PD2-TIM3_ETR/UART5_RX/SDIO_CMD/) D7.3(CMD) R64.1
FMU_SDIO_D0: D2.65(PC8-TIM3_CH3/TIM8_CH3/USART6_CK) D7.7(D0) R62.1
FMU_SDIO_D1: D2.66(PC9-MCO2/TIM3_CH4/TIM8_CH4/I2C3) D7.8(D1) R61.1
FMU_SDIO_D2: D2.78(PC10-SPI3_SCK/I2S3_CK/USART3_TX) D7.1(D2) R66.1
FMU_SDIO_D3: D2.79(PC11-I2S3EXT_SD/SPI3_MISO/USART) D7.2(D3) R65.1
FMU_SPI1_MISO: D2.31(PA6/TIM1_BKIN/TIM3_CH1/TIM8_BKI) J6.4 R47.2 U3.9(AD0/SDO) U4.6(SDO) U5.4(SDO/SA0) U8.7(SDO/SA0)
FMU_SPI1_MOSI: D2.32(PA7/TIM1_CH1N/TIM3_CH2/TIM8_CH1) J6.7 R48.2 U3.24(SDA/SDI) U4.7(SDI/SDA) U5.3(SDA/SDI/SDO) U8.6(SDA/SDI/SDO)
FMU_SPI1_SCK: D2.30(PA5/TIM2_CH1/TIM2_ETR/TIM8_CH1N) J6.8 R49.2 U3.23(SCL/SCLK) U4.8(SCLK) U5.2(SCL/SPC) U8.4(SCL/SPC)
FMU_TF_CS: D2.16(PC1-ETH_MDC) D7.9(C\D\) R60.1
FRAM_CS: D2.57(PD10-USART3_CK/FMC_D15/LCD_B3) D6.1(S\)
FRAM_MISO: D2.53(PB14-TIM1_CH2N/TIM8_CH2N/SPI2_M) D6.2(Q)
FRAM_MOSI: D2.54(PB15-RTC_REFIN/TIM1_CH3N/TIM8_C) D6.5(D)
FRAM_SCK: D2.52(PB13-TIM1_CH1N/SPI2_SCK/I2S2_CK) D6.6(C)
HEAD_IO: D2.18(PC3-SPI2_MOSI/I2S2_SD/OTG_HS_UL) J6.9
HIGH_LED_I2C1_SCL: R74.1 R75.1 U1.58(PB6/I2C1_SCL/TIM4_CH1//USART1_T)
HIGH_LED_I2C1_SDA: R76.1 R77.1 U1.59(PB7/I2C1_SDA/FSMC_NADV/TIM4_CH2)
HIGH_LED_IO0: U1.57(PB5/SPI3_MOSI//TIM3_CH2 / SPI1_) U2.32
HIGH_LED_IO1: U1.56(NJTRST/SPI3_MISO/PB4 // TIM3_CH) U2.31
IO-CH1: D1.10(PA0/WKUP/USART2_CTS/ADC12_IN0/T) R3.1
IO-CH1_OUT-J30J: R3.2 U2.3
IO-CH2: D1.11(PA1/USART2_RTS/ADC12_IN1/TIM2_C) R2.1
IO-CH2_OUT-J30J: R2.2 U2.4
IO-CH3: D1.45(PB8/TIM4_CH3/I2C1_SCL/CANRX) R13.1
IO-CH3_OUT-J30J: R13.2 U2.5
IO-CH4: D1.46(PB9/TIM4_CH4/I2C1_SDA/CANTX) R10.1
IO-CH4_OUT-J30J: R10.2 U2.6
IO-CH5: D1.16(PA6/SPI1_MISO/ADC12_IN6/TIM3_CH) R6.1
IO-CH5_OUT-J30J: R6.2 U2.7
IO-CH6: D1.17(PA7/SPI1_MOSI/ADC12_IN7/TIM3_CH) R7.1
IO-CH6_OUT-J30J: R7.2 U2.8
IO-CH7: D1.18(PB0/ADC12_IN8/TIM3_CH3/TIM1_CH2) R9.1
IO-CH7_OUT-J30J: R9.2 U2.9
IO-CH8: D1.19(PB1/ADC12_IN9/TIM3_CH4/TIM1_CH3) R12.1
IO-CH8_OUT-J30J: R12.2 U2.10
IO-RESET: C5.1 D1.7(NRST) N2.3(POR2) TP4.1
IO-SWCLK: D1.37(PA14/JTCK/SWCLK) J2.2
IO-SWDIO: D1.34(PA13/JTMS/SWDIO) J2.1
IO-USART1_RX: D1.31(PA10/USART1_RX/TIM1_CH3) J1.2
IO-USART1_TX-FMU_RX1: D1.30(PA9/USART1_TX/TIM1_CH2) J1.1 R39.1
IO-VDD_3V3: C3.1 C4.1 C7.1 C11.1 C43.1 C44.1 C45.1 D1.1(VBAT) D1.9(VDDA) D1.24(VDD_1) D1.36(VDD_2) D1.48(VDD_3) N1.8(VCC) N2.7(VOUT2) X1.4(VDD)
IO-VDD_5V5: C38.1 C49.1 C50.1 C57.1 C60.1 C61.1 D8.1(CATHODE) D9.1(K) D10.1(K) LED1.2(ANODE) N2.1(VIN) N2.4(EN2) N4.1(VIN) N4.4(EN2) R70.1 U2.58 U6.1(IN) U9.1(IN)
IO-VDD_SERVO_IN_FAULT: D1.38(PA15/JTDI/TIM2_CH1_ETR/SPI1_NSS) N3.4(F\A\U\L\T\)
IO_PPM_INPUT: D1.29(PA8/USART1_CK/TIM1_CH1/MCO) D5.1(CATHODE) N1.2(1A) R59.1
IO_RSSI_IN: D1.15(PA5/SPI1_SCK/ADC12_IN5) D1.33(PA12/USART1_RTS/CANTX/USBDPTIM1) R58.1
J30J_RC_IN: R59.2 U2.2
J30J_SB_IN: R57.2 U2.1
OSC_IN: D1.5(OSC_IN/PD0) R4.2
SBUS_INPUT: D1.22(PB11/I2C2_SDA/USART3_RX/TIM2_CH) N1.6(1Y)
SBUS_OUTPUT: D1.21(PB10/I2C2_SCL/USART3_TX/TIM2_CH) N1.5(2A)
SBUS_OUTPUT_EN: D1.40(PB4/JNTRST/TIM3_CH1/SPI1_MISO) N1.7(2\O\E\)
SERIAL_FMU_TO_IO: D2.63(PC6-TIM3_CH1/TIM8_CH1/I2S2_MCK/) R5.1
SERIAL_IO_TO_FMU: D2.64(PC7-TIM3_CH2/TIM8_CH2/I2S3_MCK/) R1.1
N1209383: C37.2 U5.14(CAP)
N1210961: C27.1 U3.20(CPOUT)
N1211035: C26.1 U3.10(REGOUT)
N1223439: D2.69(PA10/TIM1_CH3/USART1_RX/OTG_FS_) R39.2
N1223787: D2.37(PB2-BOOT) R25.2
N1224329: C23.1 D2.73(VCAP_2)
N1224475: C15.1 D2.49(VCAP_1)
N1727241: D3.1(D1I) J5.2
N1731077: C53.1 N4.6(CSET)
N1735864: D1.12(PA2/USART2_TX/ADC12_IN2/TIM2_CH) R1.2
N1735868: D1.13(PA3/USART2_RX/ADC12_IN3/TIM2_CH) R5.2
N1736012: D1.20(PB2/BOOT1) R14.1
N1736210: D1.44(BOOT0) R15.2
N1742395: D4.1(CATHODE) N1.3(2Y) R57.1 R58.2
N1876477: D2.12(PH0-OSC_OUT) R38.2
N2114481: C33.1 R50.1 R51.2 U7.5(ENA)
N2114611: C36.1 U7.1(BOOT)
N2114615: C36.2 D14.1(K) L1.2 U7.8(PH)
N2115024: R54.2 R55.1 U7.4(VSNS)
N2192418: R52.2 U6.7(ILIM)
N2192922: R68.2 U9.7(ILIM)
N2206682: D3.3(D2I) J5.3
N2257220: C39.1 U8.2(SETC)
N2257224: C39.2 U8.3(SETP)
N2322416: C8.1 R8.2 U1.7(NRST)
N2322480: R20.2 U1.60(BOOT0)
N2342002: C16.1 R28.2 R29.2 R30.1 R31.2
N2342747: D9.2(A) RT1.2
N2342829: D10.2(A) N3.8(OUT)
N2343656: C46.1 N2.6(CSET)
N2343682: N2.5(EN1) R63.2
N18163032: R38.1 X3.3(OUT)
N22861782: R4.1 X1.3(OUT)
N23081300: LED1.1(CATHODE) R56.2
N23324132: R11.1 X2.3(OUT)
N23428116: N3.7(ILIM) R67.2
N120959415: C41.1 U8.15(C1)

Pads without a net: D1 2 3 4 6 14 25 26 27 28 32 39 41 42 43; D2 1 3 4 5 8 13 15 33 34 35 36 43 47 48 51 58 59 62 77 81 82 84 85 89 90 91 92 93; N3 3; TP1 1; TP2 1; TP7 1; TP8 1; U1 2 3 4 6 8 9 10 11 14 15 20 21 24 26 27 28 33 34 35 36 44 45 50 55 61 62; U2 17 18; U3 2 3 4 5 6 7 12 14 15 16 17 19 21 22 25; U4 4; U5 6 7 8; U6 3; U7 2 3; U8 9 11; U9 3; X1 1; X2 1; X3 1

## Via types
v1: diameter 0.55, hole 0.3, TOP to BOTTOM, 531 vias

## Routing (per net, layer and track width the routed paths; a pad name or vN(x,y) marks a point on that pad's centre or on a via; arc(x,y) is an arc through that point)
GND:
  vias: v1(1.35,49.05) v1(1.35,46.55) v1(1.35,44.05) v1(1.35,41.55) v1(1.35,39.05) v1(1.35,36.55) v1(1.35,34.05) v1(1.35,31.55) v1(1.35,29.05) v1(1.35,26.55) v1(1.35,24.05) v1(1.35,21.55) v1(1.35,19.05) v1(1.35,16.55) v1(1.35,14.05) v1(1.35,11.55) v1(1.35,9.05) v1(1.35,6.55) v1(3.66,6.1) v1(3.8,48.9) v1(3.85,42.8) v1(3.85,40.3) v1(3.85,37.8) v1(3.85,35.3) v1(3.85,32.8) v1(3.85,30.3) v1(3.85,27.8) v1(3.85,25.3) v1(3.85,22.8) v1(3.85,20.3) v1(3.85,17.8) v1(3.85,15.3) v1(3.85,12.8) v1(5.8,53.75) v1(5.9,1.1) v1(6.1,4.55) v1(6.8,48.95) v1(7.35,27.1) v1(7.3,10.95) v1(7.4,29.4) v1(7.4,22.85) v1(7.45,25) v1(7.45,20.55) v1(7.5,16.65) v1(7.55,14.7) v1(8.05,46.35) v1(8.4,1.1) v1(9.35,47.7) v1(9.45,52.4) v1(9.4,50.5) v1(9.65,41.75) v1(9.95,28.25) v1(10,37.15) v1(10,26.1) v1(10.85,48.95) v1(10.75,43.9) v1(10.9,1.1) v1(11.05,42.3) v1(11.25,45.2) v1(11.32,8.2) v1(11.33,6.3) v1(11.65,3.05) v1(11.75,52.35) v1(12.35,50.45) v1(12.31,7.24) v1(12.45,32.54) v1(12.55,38.5) v1(12.55,18.65) v1(12.7,20.05) v1(13.25,16.25) v1(13.45,39.45) v1(13.45,6.3) v1(13.65,51.85) v1(14.05,45.35) v1(14.25,16.25) v1(14.9,41) v1(14.99,20.06) v1(15.1,5.9) v1(15.25,32.6) v1(15.29,16.34) v1(15.45,7.9) v1(15.85,32.6) v1(16.09,20.8) v1(17,38.15) v1(17.3,16.05) v1(17.3,5.95) v1(18.23,45.35) v1(18.35,21) v1(18.51,1.15) v1(19.9,35.4) v1(19.95,33.95) v1(20.2,52.6) v1(20.35,6.5) v1(21.01,1.15) v1(21.25,49.65) v1(21.25,12) v1(21.96,8.25) v1(21.96,6.4) v1(22.3,52.6) v1(22.65,13.45) v1(22.6,3.5) v1(22.7,30.65) v1(22.9,43.65) v1(23,40.65) v1(23.45,47.15) v1(23.51,1.15) v1(23.81,7.35) v1(24.15,12) v1(24.6,43.4) v1(24.7,5.25) v1(25.2,18.8) v1(25.65,14.75) v1(25.75,47.95) v1(25.8,46.4) v1(25.8,3.6) v1(26.9,52.65) v1(27.1,21.6) v1(27.1,19.3) v1(27.1,14.65) v1(27.3,5.25) v1(27.5,39.25) v1(27.5,3.15) v1(27.51,1.15) v1(27.8,23.65) v1(27.9,46.45) v1(27.95,7.35) v1(28.5,14.65) v1(28.65,20.9) v1(28.85,52.65) v1(28.95,48.1) v1(28.95,7.35) v1(29.35,39.25) v1(29.95,7.35) v1(30,11.35) v1(30.01,1.15) v1(30.05,25.5) v1(30.05,23.55) v1(30.35,46.45) v1(30.45,26.85) v1(30.6,49.7) v1(30.95,7.35) v1(31,14.7) v1(31.05,39.25) v1(31.12,11.4) v1(31.35,52.6) v1(31.45,4.75) v1(32,48.25) v1(32.05,25.15) v1(32.51,1.15) v1(32.85,10.25) v1(33.2,52.6) v1(33.2,4.8) v1(33.25,2.95) v1(33.35,49.6) v1(33.65,46.35) v1(34.9,7.15) v1(35.05,21.05) v1(35.05,18.8) v1(35.01,1.15) v1(35.2,47.7) v1(35.7,7.13) v1(35.8,53.75) v1(36.15,14.35) v1(36.3,7.13) v1(37.25,47.7) v1(37.51,1.15) v1(37.7,2.5) v1(37.85,16.55) v1(37.9,14.4) v1(38.65,11.65) v1(38.7,43) v1(39.15,15.5) v1(39.25,53.9) v1(39.35,47.75) v1(40,3.4) v1(40,1.15) v1(40.1,5.45) v1(40.2,41.85) v1(40.35,9.15) v1(41.05,17.9) v1(41.1,15.25) v1(41.1,10.7) v1(41.3,43.55) v1(41.3,39.95) v1(41.45,7.6) v1(41.75,53.9) v1(41.95,16.55) v1(42.4,4.65) v1(42.4,3.5) v1(42.8,51.4) v1(42.9,22.25) v1(43.32,19.64) v1(43.35,17.55) v1(43.35,15.25) v1(43.55,38.9) v1(43.5,36.43) v1(43.55,33.55) v1(43.7,3.5) v1(44.25,53.9) v1(44.3,2.1) v1(44.35,6.5) v1(44.6,51.35) v1(44.6,24.7) v1(44.6,16.1) v1(44.85,48.3) v1(44.9,44.6) v1(45.05,40.8) v1(45.2,7.8) v1(45.35,17.75) v1(45.35,5.65) v1(45.35,1.2) v1(45.55,34.75) v1(45.45,19.6) v1(45.65,37.6) v1(45.9,28.6) v1(45.9,26.55) v1(45.95,32.05) v1(46.05,11.15) v1(46.15,47.05) v1(46.1,14.6) v1(46.7,49.2) v1(47.1,40.8) v1(47.15,15.8) v1(47.2,6.75) v1(47.2,4.25) v1(47.3,1.15) v1(47.55,43.2) v1(47.8,45.55) v1(47.75,33.6) v1(47.75,19.65) v1(47.9,38.95) v1(47.85,36.4) v1(48.05,30.4) v1(48.35,26.8) v1(48.4,24.45) v1(48.4,22.4) v1(48.7,53.8) v1(48.69,47.18) v1(48.75,51.5) v1(49.15,3.15) v1(49.2,7.85) v1(49.29,40.75) v1(49.35,5.4) v1(49.55,49.4) v1(49.45,20.65) v1(49.45,1.15) v1(49.6,31.7) v1(49.85,37.25) v1(49.85,34.4) v1(49.85,28.9) v1(50.1,14.61) v1(50.35,22) v1(50.8,24.4) v1(50.9,45) v1(51.15,13) v1(51.2,20.65) v1(51.2,14.6) v1(51.4,47.45) v1(51.85,7.1) v1(51.95,37.1) v1(52.05,34.65) v1(52.05,32.15) v1(52.05,27.05) v1(52.1,42.2) v1(52.1,29.65) v1(53.35,45.5) v1(53.85,48.25) v1(54.05,18.05) v1(54.05,15.55) v1(54,13.4) v1(54,10.9) v1(54,8.3) v1(54,5.8) v1(54.07,43.45) v1(54.07,40.95) v1(54.07,38.45) v1(54.07,35.95) v1(54.07,33.45) v1(54.07,30.95) v1(54.07,28.45) v1(54.07,25.95) v1(54.07,23.45) v1(54.07,20.95)
VBUS: length 16
  TOP w0.254: D2.68 21.82,21.38 v1(21.55,21.65)
  IN1_L3 w0.254: v1(19.05,8.3) 19.7,8.95 19.7,19.8 v1(21.55,21.65)
  vias: v1(18.25,8.25) v1(18.25,7.57) v1(19.1,7.55)
VDD_3V3_SENSORS: length 62.9
  TOP w0.254: 45.79,9.35 45.68,9.47 U5.16 ; 45.79,9.35 45.41,8.97 U5.15 ; 45.79,9.35 C35.1 v1(47.15,9.35) ; v1(46.25,12.4) C31.1 45.35,11.77 44.63,11.05 44.41,11.05 44.08,10.72 U5.1 ; U8.1 45.53,3.1 46.35,2.28 C40.1 v1(47.25,2.25) ; 41.1,13.4 v1(41.1,14.3) ; 42.55,13.4 v1(42.55,14.3) ; 44,13.4 v1(44,14.2) ; v1(41.7,1.77) 41.7,1.58 42.13,1.15 C42.1 42.6,1.6 42.6,2.58
  TOP w0.381: U4.1 52.83,11.8 C32.1 v1(53.4,12.75)
  BOTTOM w0.3: J6.1 39.65,51.25 39.95,51.55 40.15,51.35 J6.2
  BOTTOM w0.7: v1(53.17,19.7) 53.17,44.23 44.55,52.85 40.7,52.85 39.95,52.1 39.95,51.55
  vias: v1(37.5,8) v1(37.7,7.15) v1(38.6,6.65) v1(38.7,8.02) v1(48.35,14.7) v1(48.55,13.95) v1(53.15,19)
VDD_3V3_SENSORS_EN: length 15.8
  TOP w0.152: D2.2 v1(37.23,18.38)
  IN1_L3 w0.152: v1(34.7,8.13) 34.7,9.95 37.23,12.48 v1(37.23,18.38)
  BOTTOM w0.152: N4.5 v1(34.7,8.13) R70.2 33.91,8.1 34.33,7.67 34.33,7.06 33.93,6.66 R73.2
VDD_5V_HIPOWER: length 23
  IN2_L4 w0.8: v1(28.35,11) 27.7,11 v1(27.7,11) 15.85,11 13.45,13.4 9.45,13.4 U2.45
  BOTTOM w0.508: D12.1 U2.45
VDD_5V_HIPOWER_OC: length 28
  TOP w0.254: U6.4 v1(31.8,6.25) 32.09,6.25 32.09,6.25 R53.1 ; D2.41 v1(29.33,30.25)
  IN1_L3 w0.254: v1(31.8,6.25) 31.8,7.05 31.55,7.3 31.55,8.05 29.33,10.27 v1(29.33,30.25)
VDD_5V_IN: length 36.9
  TOP w0.152: R27.2 34.8,35.43 34.57,35.2 v1(34.18,35.2)
  TOP w0.508: R55.2 v1(13.45,1.4)
  IN1_L3 w0.152: v1(19.9,31.88) 19.25,31.23 19.25,15.6 v1(16.95,13.3)
  IN2_L4 w0.152: v1(34.18,35.2) 30.86,31.88 v1(19.9,31.88)
  vias: v1(16.95,12.6) v1(17,4.9) v1(17,4.15) v1(17,3.43) v1(17.7,2.2) v1(17.75,13.3) v1(17.75,12.6) v1(18.5,2.2) v1(19.3,2.2)
VDD_5V_PERIPH: length 29.4
  IN2_L4 w0.8: v1(32.05,8.8) 32.05,9.05 v1(31.8,9.3) 15.4,9.3 12.55,12.15 7.52,12.15 U2.23
  BOTTOM w0.508: D13.1 U2.23
VDD_5V_PERIPH_EN: length 26.6
  TOP w0.254: D2.67 24.07,21.88 v1(24.55,21.4) ; v1(32.18,7.75) 31.48,8.45 U6.5
  IN1_L3 w0.254: v1(24.55,21.4) 23.35,20.2 23.35,10.86 v1(26.25,7.96)
  IN2_L4 w0.254: v1(32.18,7.75) 31.65,7.75 31.44,7.96 v1(26.25,7.96)
  BOTTOM w0.254: U9.5 27.05,8.45 26.71,8.79 R69.2 26.2,8.05 26.25,8 v1(26.25,7.96)
VDD_5V_PERIPH_OC: length 27.2
  TOP w0.254: D2.46 v1(26.83,30.1)
  IN1_L3 w0.254: v1(26.83,30.1) 26.45,29.73 26.45,9.15 26.95,8.65 v1(26.95,6.25)
  BOTTOM w0.254: U9.4 v1(26.95,6.25) 26.71,6.25 26.71,6.25 R72.1
VDD_5V_SENS: length 4.3
  TOP w0.152: R26.1 R27.1 34.8,34.42 35.33,33.89 D2.29
VIN_3S-6S: length 48.7
  TOP w0.254: v1(47.5,21.4) 47.5,29.6 46.2,30.9 44.6,30.9 ; v1(17.6,19.85) 17.6,17.68 17.6,17.65 14.57,14.62 14.5,14.62
  IN2_L4 w0.254: v1(17.6,19.85) 18.05,20.3 40.7,20.3 41.18,20.78 46.88,20.78 v1(47.5,21.4)
ACTION_IO: length 40.8
  TOP w0.152: v1(37.35,50.75) 37.75,50.35 U1.25
  IN2_L4 w0.114: 7.6,40.6 7.6,39.38 U2.26
  IN2_L4 w0.152: 7.6,40.6 7.6,43.9 15.14,51.44 36.66,51.44 v1(37.35,50.75)
AS-I2C1-SCL-J30J: length 34.1
  TOP w0.114: 11.6,34.48 U2.29
  TOP w0.152: v1(22.04,35.5) 21.39,34.85 19.61,34.85 19.16,35.29 18.03,35.29 17.22,34.48 11.6,34.48
  IN2_L4 w0.152: v1(35.35,46.1) 35.35,43.75 33.97,42.37 32.3,42.37 30.44,40.51 27.48,40.51 23.8,36.83 23.37,36.83 v1(22.04,35.5)
  BOTTOM w0.152: R74.2 v1(35.35,46.1)
AS-I2C1-SDA-J30J: length 31
  TOP w0.114: 11.6,33.22 8.68,33.22
  TOP w0.152: v1(22.1,34.75) 20.57,33.22 11.6,33.22
  IN2_L4 w0.152: v1(22.1,34.75) 23.67,36.32 23.75,36.32 27.63,40.2 34.24,40.2 v1(34.84,40.79)
  BOTTOM w0.152: v1(34.84,40.79) 35.69,41.64 R77.2
AS-RADAR_R5: length 34.1
  TOP w0.152: U1.54 v1(36.75,39.25)
  IN1_L3 w0.152: v1(36.45,33) 36.05,33.4 36.05,38.55 v1(36.75,39.25)
  IN2_L4 w0.114: 11.6,31.31 U2.53
  IN2_L4 w0.152: v1(36.45,33) 34.78,31.33 19.46,31.33 19.19,31.6 12.35,31.6 12.06,31.31 11.6,31.31
AS-RADAR_T5: length 32.7
  TOP w0.152: v1(32.97,36.22) 33.39,36.65 35.75,36.65 36.25,37.15 U1.53
  IN1_L3 w0.152: v1(32.97,36.22) 32.3,35.56 v1(32.3,30.1)
  IN2_L4 w0.114: U2.54 11.6,30.04
  IN2_L4 w0.152: v1(32.3,30.1) 31.5,30.9 24.6,30.9 23.74,30.04 11.6,30.04
AS-SWCLK: length 16.9
  TOP w0.152: U1.49 34.25,40.99 34.6,41.35 34.6,47.23 32.1,49.73 J4.2
AS-SWDIO: length 15.9
  TOP w0.152: U1.46 33.25,40.9 34.3,41.95 34.3,47.1 30.1,51.3 J4.1
AS-USART1_RX: length 25.2
  TOP w0.152: v1(31.05,41.85) 31.6,42.4 U1.43
  IN2_L4 w0.114: U2.52 11.6,32.96
  IN2_L4 w0.152: v1(31.05,41.85) 30.07,40.87 27.37,40.87 23.7,37.2 15.84,37.2 11.6,32.96
AS-USART1_TX: length 27.4
  TOP w0.152: U1.42 v1(33.6,42.9)
  IN2_L4 w0.114: U2.51 11.6,34.23
  IN2_L4 w0.152: v1(33.6,42.9) 31.3,42.9 29.6,41.2 27.25,41.2 23.56,37.51 14.88,37.51 11.6,34.23
AS-USART3_RX: length 33.4
  TOP w0.152: U1.30 v1(35.25,50.35)
  IN2_L4 w0.152: U2.24 8.68,44.01 15.02,50.35 v1(35.25,50.35)
AS-USART3_TX: length 37.5
  TOP w0.152: U1.29 35.75,50.16 35.75,50.16 35.75,50.45 v1(36.2,50.9)
  IN2_L4 w0.114: U2.25 7.95,40.3 7.95,40.6
  IN2_L4 w0.152: v1(36.2,50.9) 15.05,50.9 7.95,43.8 7.95,40.6
AS-USART4_RX: length 33.7
  TOP w0.152: v1(32.85,37) 35.6,37 35.75,37.15 U1.52
  IN1_L3 w0.152: v1(32.85,37) 31.75,35.9 v1(31.75,29)
  IN2_L4 w0.114: 11.6,28.77 U2.55
  IN2_L4 w0.152: v1(31.75,29) 30.62,27.87 24.05,27.87 23.15,28.77 11.6,28.77
AS-USART4_TX: length 36
  TOP w0.152: v1(34.8,39.4) 35.25,38.95 U1.51
  IN1_L3 w0.152: v1(34.8,39.4) 34.8,29.25 v1(33.45,27.9)
  IN2_L4 w0.114: 11.6,27.5 U2.56
  IN2_L4 w0.152: 11.6,27.5 33.05,27.5 v1(33.45,27.9)
AS-VDD_3V3: length 24.6
  TOP w0.254: v1(45.8,39.15) C10.1 U1.1 ; U1.19 40.75,50.79 C1.1 40.75,51.65 v1(41.05,51.96) ; U1.13 C6.1 v1(45.75,45.3) ; C13.1 41.75,35.58 ; 41.75,35.58 41.67,35.58 41.08,36.17 v1(41.08,36.8) ; 41.75,35.58 U1.64 ; v1(34.95,52.6) 34.25,51.9 C2.1 34.25,50.74 U1.32 ; v1(51.85,40.35) C9.1 X2.4 ; v1(32.85,37.75) 32.65,37.95 C12.1 32.05,38.49 32.37,38.81 U1.48 ; R8.1 v1(47.65,44.6)
  BOTTOM w0.254: R76.2 R75.2 v1(36.17,45.37)
  vias: v1(18.85,34.75) v1(18.85,34.05)
AS_OSC_IN: length 2.2
  TOP w0.152: R11.2 45.36,41.9 45.36,41.9 U1.5
AS_PWM0: length 24.6
  TOP w0.152: U1.41 31.05,43.4 v1(30.8,43.15)
  IN2_L4 w0.114: 11.6,35.12 U2.50
  IN2_L4 w0.152: v1(30.8,43.15) 29.2,41.55 23.1,41.55 21.6,40.05 16.78,40.05 11.85,35.12 11.6,35.12
AS_PWM1: length 26.7
  TOP w0.152: U1.40 v1(33.6,43.9)
  IN2_L4 w0.114: 11.6,36.39 U2.49
  IN2_L4 w0.152: 11.6,36.39 11.85,36.39 16.12,40.66 21.31,40.66 22.85,42.2 28.1,42.2 29.6,43.7 32.91,43.7 33.12,43.9 v1(33.6,43.9)
AS_PWM2: length 24.2
  TOP w0.152: U1.39 31.3,44.4 v1(31.1,44.2)
  IN2_L4 w0.114: U2.48 11.6,38.04
  IN2_L4 w0.152: 11.6,38.04 11.89,38.33 11.89,38.84 15.42,42.37 19.67,42.37 21.5,44.2 v1(31.1,44.2)
AS_PWM3: length 25.8
  TOP w0.152: v1(33.45,44.9) U1.38
  IN2_L4 w0.114: U2.47 11.6,39.31
  IN2_L4 w0.152: v1(33.45,44.9) 32.97,44.9 32.97,44.9 30.85,44.9 30.57,44.62 21.47,44.62 19.52,42.67 14.96,42.67 11.6,39.31
BATT_CURRENT_SENS-J30J: length 35.5
  TOP w0.152: R19.2 R18.2 37.07,35.55 v1(36.83,35.31)
  IN1_L3 w0.152: v1(36.83,35.31) 37.35,34.79 37.35,33.05 36.25,31.95 36.25,28.79 33.86,26.4 v1(32.25,26.4)
  IN2_L4 w0.114: 11.6,26.23 U2.57
  IN2_L4 w0.152: 11.6,26.23 31.6,26.23 31.77,26.4 v1(32.25,26.4)
CAMERA_IO: length 23.7
  TOP w0.152: U1.37 v1(31.1,45.4)
  IN2_L4 w0.114: 11.6,40.58 U2.46
  IN2_L4 w0.152: v1(31.1,45.4) 30.66,45.85 22.25,45.85 19.38,42.98 14,42.98 11.6,40.58
CAPTURE_SPEED0: length 46.8
  TOP w0.152: U1.22 39.25,50.85 v1(38.8,51.3)
  IN2_L4 w0.114: 6.9,40.6 6.9,37.53 8.68,35.76
  IN2_L4 w0.152: 6.9,40.6 6.9,44.15 14.8,52.05 38.05,52.05 v1(38.8,51.3)
CAPTURE_SPEED1: length 43.9
  TOP w0.152: v1(38.15,50.95) 38.75,50.35 U1.23
  IN2_L4 w0.114: U2.27 7.25,38.45 7.25,40.6
  IN2_L4 w0.152: v1(38.15,50.95) 37.35,51.75 15,51.75 7.25,44 7.25,40.6
FMU2AS-RX8: length 40.4
  TOP w0.152: U1.16 v1(44.8,47.4) ; D2.97 v1(35.33,14.72)
  IN1_L3 w0.152: v1(35.33,14.72) 36.55,15.94 36.55,22.15 37.5,23.1 37.5,23.97 39.63,26.09 39.63,43.08 40.77,44.22 40.77,45.44 42.59,47.25 44.17,47.25 44.32,47.4 v1(44.8,47.4)
FMU2AS-TX8: length 35.6
  TOP w0.152: v1(39.95,44.3) 41.75,46.1 41.75,46.41 41.75,46.41 U1.17 ; D2.98 v1(35.83,17.6)
  IN1_L3 w0.152: v1(39.95,44.3) 39.32,43.67 39.32,26.22 37.2,24.1 37.2,23.25 35.83,21.88 v1(35.83,17.6)
FMU-CH1: length 3.2
  TOP w0.152: R21.1 26.3,34.42 27.33,33.39 D2.45
FMU-CH1_OUT-J30J: length 29.4
  TOP w0.152: v1(25.48,36.3) 26.3,35.48 R21.2
  IN1_L3 w0.152: v1(24.55,25.6) 23.7,26.45 23.7,34.52 v1(25.48,36.3)
  IN2_L4 w0.114: U2.37 9.96,25.6 11.53,25.6
  IN2_L4 w0.152: 11.53,25.6 v1(24.55,25.6)
FMU-CH2: length 2.8
  TOP w0.152: R22.1 27.75,33.96 27.83,33.88 D2.44
FMU-CH2_OUT-J30J: length 32.4
  TOP w0.152: R22.2 27.75,36.13 27.95,36.33 v1(28.05,36.43)
  IN1_L3 w0.152: v1(28.05,36.43) 28.05,35.96 27.74,35.64 27.74,29.31 28.1,28.95 28.1,26.05 v1(27.75,25.7)
  IN2_L4 w0.114: U2.38 9.94,24.32 11.6,24.32
  IN2_L4 w0.152: 11.6,24.32 12.02,24.32 12.8,25.1 26.45,25.1 27.05,25.7 v1(27.75,25.7)
FMU-CH3: length 5.6
  TOP w0.152: R16.1 29.2,36.92 28.65,36.37 28.65,33.05 28.83,32.87 D2.42
FMU-CH3_OUT-J30J: length 34.2
  TOP w0.152: v1(28.45,37.55) 28.86,37.95 R16.2
  IN1_L3 w0.152: v1(28.45,37.55) 27.44,36.54 27.44,29.79 26.81,29.16 26.81,25.53 v1(27.25,25.09)
  IN2_L4 w0.114: U2.39 9.96,23.06 11.6,23.06
  IN2_L4 w0.152: 11.6,23.06 11.96,23.06 13.65,24.75 26.91,24.75 v1(27.25,25.09)
FMU-CH4: length 3.1
  TOP w0.152: D2.40 29.83,33.79 29.2,34.42 R23.1
FMU-CH4_OUT-J30J: length 33.9
  TOP w0.152: R23.2 v1(29.2,36.1)
  IN1_L3 w0.152: v1(29.2,36.1) 28.05,34.95 28.05,29.45 28.49,29.01 28.49,25.24 v1(28.15,24.9)
  IN2_L4 w0.114: 11.6,21.79 9.96,21.79 U2.40
  IN2_L4 w0.152: v1(28.15,24.9) 27.65,24.4 14.55,24.4 11.94,21.79 11.6,21.79
FMU-CH5: length 2.5
  TOP w0.152: R36.1 21.8,25.6 22.02,25.38 D2.60
FMU-CH5_OUT-J30J: length 13.8
  TOP w0.114: U2.41 9.7,20.27 9.7,20.75 10.73,21.78 11.6,21.78
  TOP w0.152: 11.6,21.78 11.73,21.78 15.55,25.6 R36.2
FMU-CH6: length 2.7
  TOP w0.152: R37.1 20.63,24.15 21.36,24.88 D2.61
FMU-CH6_OUT-J30J: length 13.7
  TOP w0.114: 8.68,17.98 10.15,19.45 10.15,19.85 10.81,20.51 11.6,20.51
  TOP w0.152: R37.2 19.57,24.15 16.87,21.45 12.95,21.45 12.01,20.51 11.6,20.51
FMU-I2C1-SCL-J30J: length 26.1
  TOP w0.152: R44.2 v1(32.8,12.39)
  IN2_L4 w0.114: 8.68,15.44 9.37,15.44 10.5,14.3
  IN2_L4 w0.152: 10.5,14.3 10.7,14.1 31.1,14.1 v1(32.8,12.39)
FMU-I2C1-SDA-J30J: length 29.6
  TOP w0.152: R46.2 v1(35.76,12.39)
  IN2_L4 w0.114: 11.6,16.7 U2.43
  IN2_L4 w0.152: v1(35.76,12.39) 32.8,15.35 13.15,15.35 11.79,16.7 11.6,16.7
FMU-I2C1_SCL: length 4.5
  TOP w0.152: D2.95 34.33,14.21 33.55,13.43 33.55,13.4 32.1,13.4
FMU-I2C1_SDA: length 4.2
  TOP w0.152: 36.45,13.4 35,13.4 35,13.89 34.82,14.06 34.82,14.93 34.83,14.93 D2.96
FMU-RESET: length 31.6
  TOP w0.152: TP5.1 41.73,25.08 41.17,24.52 C19.1 40.66,24.52 40.52,24.38 D2.14 37.33,24.38 v1(36.4,23.45) ; v1(33.47,5.6) 33.92,5.15 v1(35.75,5.15)
  IN1_L3 w0.152: v1(33.47,5.6) 34.05,6.18 34.05,21.1 v1(36.4,23.45)
  BOTTOM w0.152: v1(33.47,5.6) 32.9,6.18 32.9,6.66 ; N4.3 v1(35.75,5.15)
FMU-RX2: length 3.2
  TOP w0.152: 29.2,13.4 29.2,13.43 30.33,14.56 D2.87
FMU-RX2-J30J: length 25.7
  TOP w0.152: v1(24,14.75) 27,11.75 28.58,11.75 29.2,12.37 R41.2
  IN2_L4 w0.114: U2.22 7.4,16.06 10.04,16.06 10.67,15.43 11.6,15.43
  IN2_L4 w0.152: v1(24,14.75) 12.8,14.75 12.12,15.43 11.6,15.43
FMU-RX3: length 2.6
  TOP w0.152: D2.56 22.02,27.38 21.7,27.05 R35.1
FMU-RX3-J30J: length 10.3
  TOP w0.114: 11.6,22.8 U2.60
  TOP w0.152: 11.6,22.8 15.85,27.05 R35.2
FMU-RX4: length 5
  TOP w0.152: R32.1 43.11,29.4 43.08,29.37 39.64,29.37 39.63,29.38 D2.24
FMU-RX4-J30J: length 43.4
  TOP w0.152: 44.6,29.4 v1(44.6,28.66)
  IN2_L4 w0.114: U2.19 7.42,19.89 10.32,19.89 10.96,20.52 11.6,20.52
  IN2_L4 w0.152: 11.6,20.52 11.92,20.52 13.7,22.3 18,22.3 18.16,22.46 38.41,22.46 v1(44.6,28.66)
FMU-RX7: length 5.8
  TOP w0.152: R17.1 30.65,36.92 31.35,36.22 31.35,33.5 30.83,32.98 D2.38
FMU-RX7-J30J: length 25.5
  TOP w0.114: 11.6,29.41 U2.33
  TOP w0.152: v1(22.38,32.42) 19.36,29.41 11.6,29.41 ; v1(29.9,37.4) 30.12,37.4 30.65,37.93 R17.2
  IN2_L4 w0.152: v1(29.9,37.4) 29.48,36.98 27.63,36.98 25.89,35.23 25.19,35.23 v1(22.38,32.42)
FMU-SWCLK: length 39
  TOP w0.152: D2.76 v1(24.83,17.58)
  IN1_L3 w0.152: v1(24.83,17.58) 25.95,18.7 25.95,30 26.9,30.95 26.9,50.95 25.6,52.25 J3.2
FMU-SWDIO: length 38.2
  TOP w0.152: D2.72 v1(24.53,19.38)
  IN1_L3 w0.152: J3.1 26.55,50.8 26.55,31.1 24.89,29.44 24.89,26.26 25.3,25.85 25.3,20.15 v1(24.53,19.38)
FMU-TX2: length 3.8
  TOP w0.152: D2.86 29.83,15.03 28.21,13.4 27.75,13.4
FMU-TX2-J30J: length 25
  TOP w0.152: v1(24.05,16) 24.05,15.52 27.18,12.39 R40.2
  IN2_L4 w0.114: 11.6,17.97 10.27,17.97 9.63,17.33 7.4,17.33 U2.21
  IN2_L4 w0.152: 11.6,17.97 18.68,17.97 20.65,16 v1(24.05,16)
FMU-TX3: length 2.7
  TOP w0.152: R33.1 21.4,28.5 22.02,27.88 D2.55
FMU-TX3-J30J: length 10.4
  TOP w0.114: U2.59 11.6,24.07
  TOP w0.152: 11.6,24.07 16.03,28.5 R33.2
FMU-TX4: length 5.4
  TOP w0.152: D2.23 39.63,28.88 39.71,28.95 42.57,28.95 43.57,27.95 R34.1
FMU-TX4-J30J: length 43.4
  TOP w0.152: 44.6,27.95 v1(44.6,27)
  IN2_L4 w0.114: 11.6,19.25 10.3,19.25 9.65,18.6 7.4,18.6 U2.20
  IN2_L4 w0.152: v1(44.6,27) 43.45,27 38.6,22.15 18.35,22.15 15.45,19.25 11.6,19.25
FMU-TX7: length 2.9
  TOP w0.152: D2.39 30.33,34.12 R24.1
FMU-TX7-J30J: length 30.1
  TOP w0.152: R24.2 30.65,35.94 30.44,36.15 v1(30.35,36.15)
  IN1_L3 w0.152: v1(30.35,36.15) v1(30.35,29.2)
  IN2_L4 w0.114: 8.68,28.14 9.94,29.4 11.6,29.4
  IN2_L4 w0.152: v1(30.35,29.2) 25.45,29.2 25.25,29.4 11.6,29.4
FMU-VDD_3V3: length 77.7
  TOP w0.152: v1(34.64,11.6) 34.64,12.04 R45.2 ; R43.2 v1(32.1,11.7)
  TOP w0.254: v1(20.75,17.25) C24.1 D2.75 ; v1(41.7,21.49) 41.7,21.62 C20.1 41.22,22.08 40.42,22.88 D2.11 ; v1(41.15,25.95) 41.15,26.7 41.15,26.7 C18.1 40.61,26.72 40.46,26.88 D2.19 ; X3.4 42.65,21.18 C21.1 v1(42.3,20.2) ; v1(41.15,28.4) C17.1 40.8,27.74 40.79,27.74 40.61,27.92 ; D2.100 36.83,14.4 37.8,13.43 C30.1 v1(38.45,13.4) ; v1(36.74,33.95) 36.7,33.99 36.7,34 36.25,34.45 C14.1 36.15,33.91 35.83,33.59 D2.28 ; D2.22 40.16,28.38 40.61,27.92 ; 40.61,27.92 40.56,27.88 D2.21 ; v1(41.35,20.11) 41.35,19.5 C22.1 40.61,19.45 39.68,20.38 D2.6 ; D2.50 24.83,30.37 v1(24.95,30.25)
  TOP w0.3: R53.2 32.8,7.81 33.1,8.11 v1(33.1,9.15)
  IN2_L4 w0.254: v1(33.1,9.15) 33.1,7.85 32.3,7.05 31.65,7.05 31.22,6.62 27.53,6.62 26.89,7.25 v1(25.45,7.25) ; v1(32.65,17.5) 32.03,16.88 21.13,16.88 v1(20.75,17.25)
  BOTTOM w0.254: v1(25.45,7.25) R72.2 ; v1(35.25,28.5) 35.75,28 R66.2 R65.2 R64.2 36.15,30.9 35.71,31.33 35.71,33.06 36.23,33.58 36.37,33.58 v1(36.74,33.95) 36.74,34.03 R62.2 R61.2 R60.2
  BOTTOM w0.3: D6.7 32.09,32.72 32.25,32.55 32.25,31.66 32.37,31.55 ; D6.8 32.27,31.45 32.37,31.55 ; 32.37,31.55 C48.1 32.9,31.57 33.9,32.57 v1(33.9,33.2)
  BOTTOM w0.381: D7.4 40.78,32.01 41.2,32.43 v1(41.2,33.15)
  vias: v1(25.66,33.98) v1(35.95,10.35) v1(36,9.45) v1(37.62,10.55) v1(37.63,9.7)
FMU_ACCEL_MAG_CS_N: length 48.7
  TOP w0.152: v1(41.9,5.8) 42.08,5.62 U8.8 ; D2.9 39.79,21.88 39.97,21.69 v1(40,21.69)
  IN1_L3 w0.152: v1(41.9,5.8) 39.66,8.04 39.66,21.35 v1(40,21.69) 42.25,23.94 v1(42.25,46.2)
  BOTTOM w0.152: J6.6 42.15,49.4 42.15,49.39 42.15,46.78 42.25,46.68 v1(42.25,46.2)
FMU_BARO_CS_N: length 23.8
  TOP w0.152: D2.88 30.83,17.13 31.1,17.4 31.65,17.4 32.35,18.1 36.3,18.1 37.15,17.25 42.6,17.25 47.35,12.5 47.35,11.05 48.17,10.24 U4.5
FMU_BATT_CURRENT_SENS: length 3.2
  TOP w0.152: D2.26 36.83,32.67 37.5,33.34 R18.1
FMU_BATT_VOLTAGE_SENS: length 2.5
  TOP w0.152: R31.1 39.66,29.85 39.63,29.88 D2.25
FMU_BOOT0: length 4.9
  TOP w0.152: 30.65,13.4 30.65,13.43 31.62,14.4 33.16,14.4 33.83,15.07 D2.94
FMU_GYRO_CS_N: length 44.1
  TOP w0.152: D2.7 v1(40.4,20.88) ; U5.5 42.08,11.12 v1(41.8,11.4)
  BOTTOM w0.152: J6.3 40.65,48.65 40.55,48.55 40.55,43 42.7,40.85 42.7,23.65 40.4,21.35 v1(40.4,20.88) 40.4,12.8 v1(41.8,11.4)
FMU_MPU_CS_N: length 41.7
  TOP w0.152: U3.8 47.24,18.37 46.8,18.8 46.8,25.35 46.27,25.88 42.63,25.88 42.2,25.45 40.53,25.45 v1(40.1,25.88) D2.17
  IN1_L3 w0.152: v1(40.1,25.88) 41.9,27.68 41.9,44.42 41.65,44.67 v1(41.65,45.15)
  BOTTOM w0.152: J6.5 41.65,49.4 41.65,49.39 41.65,45.63 41.65,45.63 v1(41.65,45.15)
FMU_OTG_FS_DM: length 16.2
  TOP w0.152: D2.70 22.01,20.38 21.92,20.28 19.28,20.28 18.65,19.65 18.65,16.1 20.2,14.55 20.2,9.66 19.85,9.31 D3.6
FMU_OTG_FS_DP: length 15.7
  TOP w0.152: D2.71 22.01,19.88 21.92,19.97 19.4,19.97 18.95,19.52 18.95,16.23 20.5,14.68 20.5,9.66 20.85,9.31 D3.4
FMU_SDIO_CK: length 26.2
  TOP w0.152: v1(31.42,17.95) 31.08,18.29 27.99,18.29 26.83,17.13 D2.80
  IN1_L3 w0.152: v1(38.51,33.11) 38.51,26.96 33.65,22.1 33.65,19.6 32,17.95 v1(31.42,17.95)
  BOTTOM w0.152: D7.5 v1(38.51,33.11)
FMU_SDIO_CMD: length 22.2
  TOP w0.152: v1(30.5,17.75) 28.95,17.75 28.33,17.13 D2.83
  IN1_L3 w0.152: v1(30.5,17.75) 30.5,22.55 36.68,28.73 36.68,29.68 v1(37.15,30.15)
  BOTTOM w0.152: v1(37.15,30.15) 37.15,30.5 37.18,30.53 R64.1 37.67,30.9 37.68,30.91 D7.3
FMU_SDIO_D0: length 26.8
  TOP w0.152: v1(34.1,24.15) 32.83,22.88 D2.65
  IN1_L3 w0.152: v1(34.1,24.15) 37.7,27.75 37.7,30.65 37.5,30.85 v1(37.5,32.4)
  BOTTOM w0.152: 37.21,34.6 R62.1 ; 37.21,34.6 37.5,34.31 v1(37.5,32.4) ; 37.21,34.6 37.92,35.31 D7.7
